# EAGLE board Dump Load 2 (EAGLE 6.2)
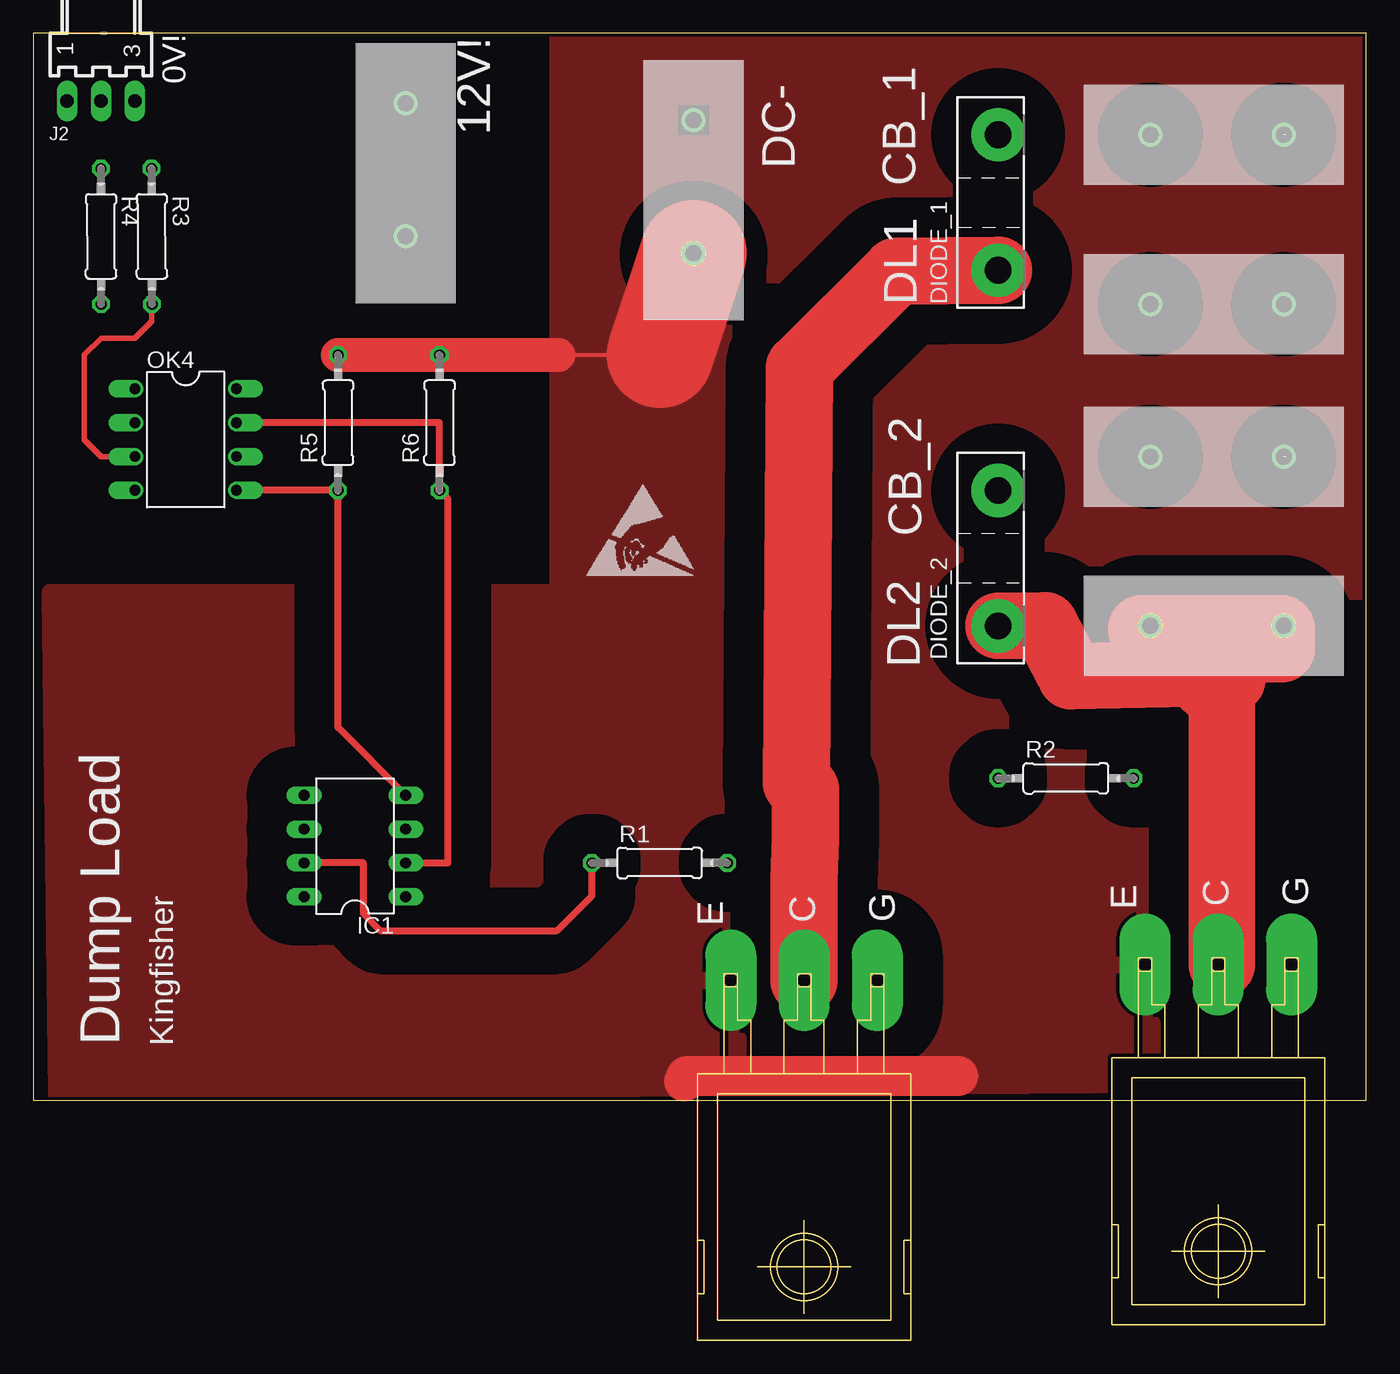
[diagram p0: board, top side]
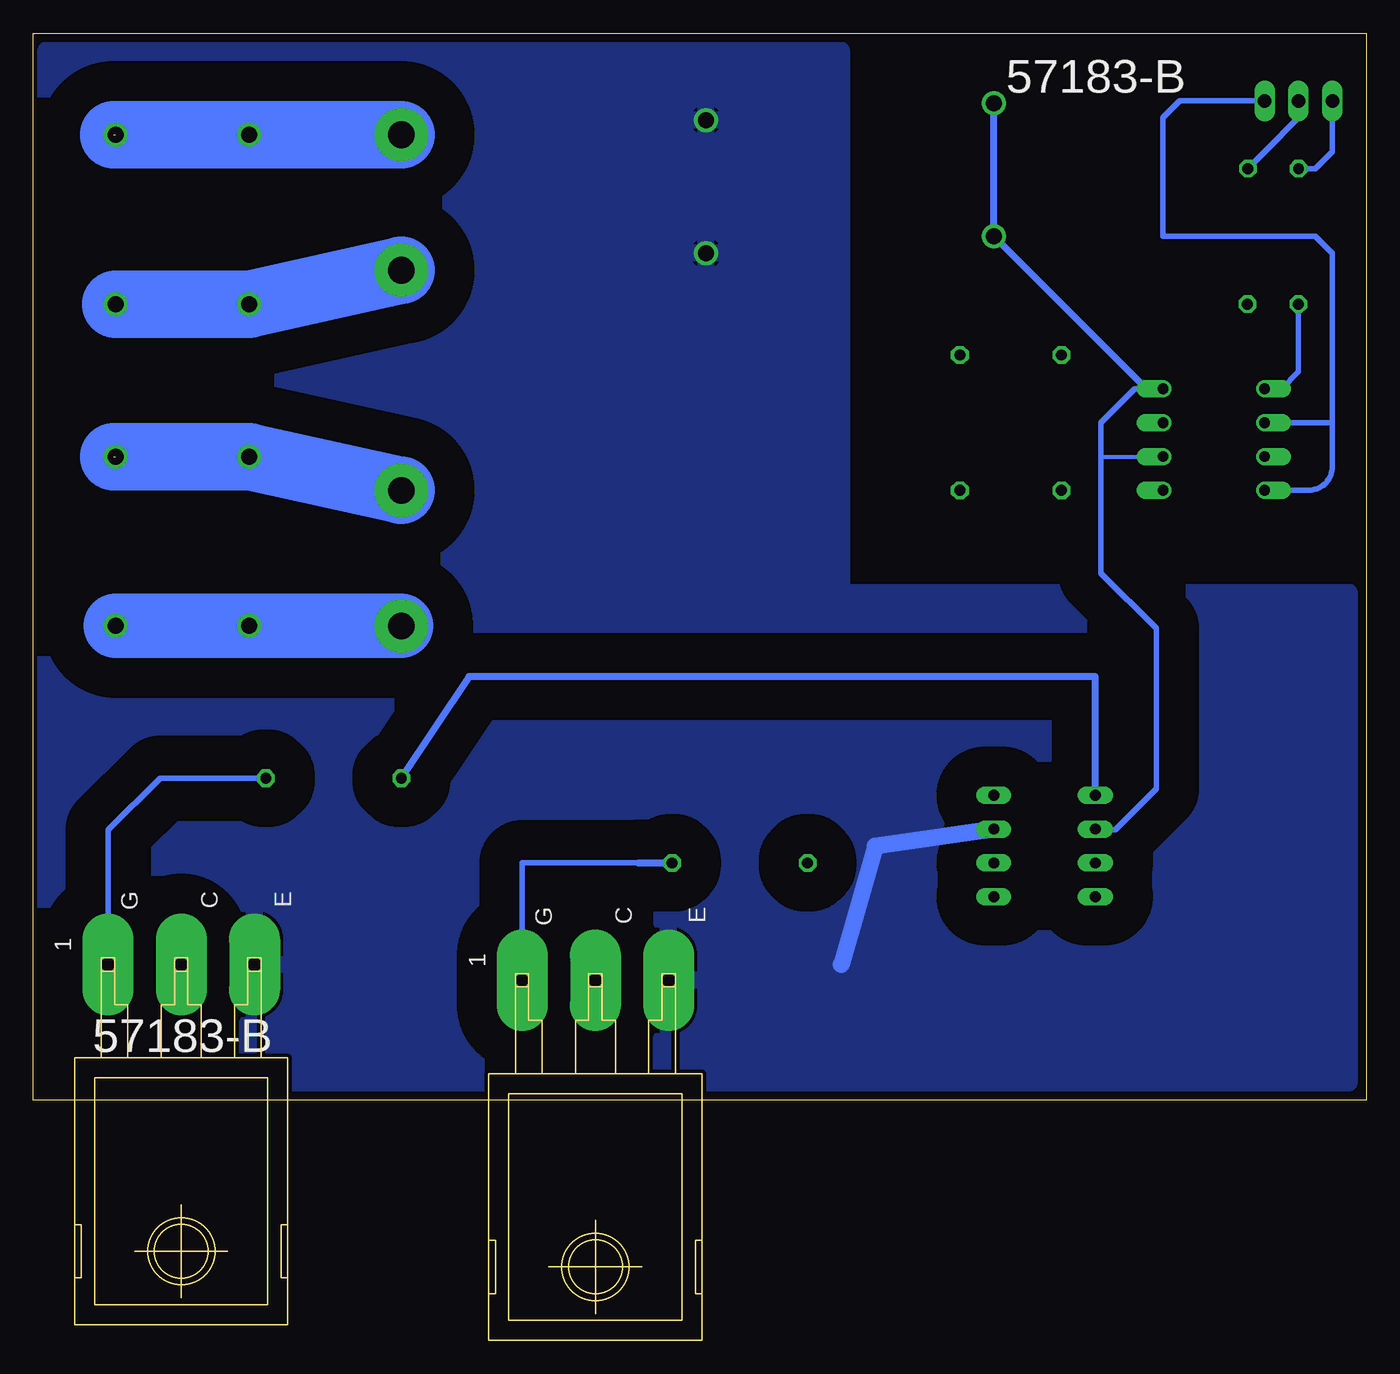
[diagram p1: board, bottom side, seen from below]

Size 100 x 80 mm. Coordinates in mm from the lower left corner, seen from the top.
Outline: 0,0 100,0 100,80 0,80 0,0
Copper layers (1*16): Top 0.035mm / dielectric 1.5mm / Bottom 0.035mm
Design rules: minimum track width 6mil, minimum drill 12mil, track to track 3mm, track to pad 3mm, pad to pad 6mil, via to via 6mil, smd to smd 0mil, copper to edge 10mil, drill to drill 10mil, minimum pad ring 10mil, minimum via ring 6mil, stop-mask expansion 2mil, vias tented up to drill 100mil, thermal gap 10mil
Net classes: 0 default: width 0.381 mm, drill 0.61 mm, clearance 0.381 mm; 1 DC link: width 2.54 mm, drill 1.321 mm, clearance 0.508 mm

## Footprints (pad centres in the part's own frame; a part is rotated, then mirrored left to right if it is on the bottom)
HIGH_AMP_TERMINAL = drill 1.2: P$1 0,0; P$2 10,0
TO-247-2V = drill 2 pad 4: 1 -5.08,0; 2 5.08,0
DIL08 = drill 0.813 long: 1 -3.81,-3.81; 2 -1.27,-3.81; 3 1.27,-3.81; 4 3.81,-3.81; 5 3.81,3.81; 6 1.27,3.81; 7 -1.27,3.81; 8 -3.81,3.81
7395-03 = drill 1.016 long: 1 2.54,0; 2 0,0; 3 -2.54,0
DIL08' = drill 0.813 offset: 1 -3.81,-3.81; 2 -1.27,-3.81; 3 1.27,-3.81; 4 3.81,-3.81; 5 3.81,3.81; 6 1.27,3.81; 7 -1.27,3.81; 8 -3.81,3.81
0207/10 = drill 0.813 octagon: 1 -5.08,0; 2 5.08,0
TO-247-FLATUD = drill 1 pad 3.81 long: P$1 0,-5.5; P$2 0,0; P$3 0,5.5

## Placement (x,y rotation side)
DC_CB_1  HIGH_AMP_TERMINAL  [HIGH_AMP_TERMINAL]  83.82,72.39 0 top
DC_CB_2  HIGH_AMP_TERMINAL  [HIGH_AMP_TERMINAL]  83.82,48.26 0 top
DIODE_1  [TO-247-2V]  72.39,67.31 90 top
DIODE_2  [TO-247-2V]  72.39,40.64 90 top
DL1  HIGH_AMP_TERMINAL  [HIGH_AMP_TERMINAL]  83.82,59.69 0 top
DL2  HIGH_AMP_TERMINAL  [HIGH_AMP_TERMINAL]  83.82,35.56 0 top
IC1  [DIL08]  24.13,19.05 90 top
J2  22-05-7038-03  [7395-03]  5.08,74.93 180 top
OK4  TIL198  [DIL08']  11.43,49.53 270 top
R1  [0207/10]  46.99,17.78 0 top
R2  [0207/10]  77.47,24.13 0 top
R3  [0207/10]  8.89,64.77 270.2 top
R4  [0207/10]  5.08,64.77 270.1 top
R5  [0207/10]  22.86,50.8 90 top
R6  [0207/10]  30.48,50.8 90 top
U$1  TO-247C  [TO-247-FLATUD]  57.83,8.99 270 bottom
U$2  TO-247C  [TO-247-FLATUD]  88.9,10.16 270 bottom
U$4  HIGH_AMP_TERMINAL  [HIGH_AMP_TERMINAL]  49.53,63.5 90 top
VCC_12V  HIGH_AMP_TERMINAL  [HIGH_AMP_TERMINAL]  27.94,64.77 90 top

## Library data of the parts
DC_CB_1 DC_CB_2 DL1 DL2 U$4 VCC_12V = rectifier_components
DIODE_1 DIODE_2 = resistor-power; OC_FARNELL: unknown; OC_NEWARK: unknown
IC1 = ic-package
J2 = con-molex; OC_FARNELL: unknown; OC_NEWARK: unknown
OK4 = optocoupler; OC_FARNELL: unknown; OC_NEWARK: unknown
R1-R6 = rcl
U$1 U$2 = to-247_n-channel_igbt

## Nets
DC- [DC link]: IC1.3 R5.2 R6.2 U$1.P$3 U$2.P$3 U$4.P$1 U$4.P$2
GND: J2.3 OK4.2 OK4.4
N$1: R1.2 U$1.P$1
N$2: R2.2 U$2.P$1
N$4: IC1.4 OK4.5 R5.1
N$5: IC1.7 R1.1
N$6: IC1.5 R2.1
N$7: J2.1 R4.1
N$8: IC1.6 OK4.6 OK4.8 VCC_12V.P$1 VCC_12V.P$2
N$9: DIODE_2.1 DL2.P$1 DL2.P$2 U$2.P$2
N$10: OK4.3 R3.2
N$11: J2.2 R3.1
N$13: OK4.1 R4.2
N$14 [DC link]: DC_CB_1.P$1 DC_CB_1.P$2 DIODE_1.2
N$15: IC1.2 OK4.7 R6.1
N$18 [DC link]: DIODE_1.1 DL1.P$1 DL1.P$2 U$1.P$2
N$19 [DC link]: DC_CB_2.P$1 DC_CB_2.P$2 DIODE_2.2

## Tracks (layer width: path | path; a pad name or v marks a point on that pad's centre or on a via)
DC-
  Top 0.305: 39.37,55.88 47.03,55.9
  Top 2.54: R5.2 R6.2 39.37,55.88
  Top 3: 69.4,1.81 49.01,1.81 48.84,1.4
  Top 8: 47.03,55.9 U$4.P$1
  Bottom 1.27: IC1.3 36.83,19.05 39.37,10.16
  pour Top: 39.37,80.01 99.06,80.01 99.06,1.27 1.75,0.51 1.27,38.1 39.37,38.1
  pour Bottom: 39.37,78.74 39.37,38.1 1.27,38.1 1.27,1.27 99.06,1.27 99.06,78.74
GND
  Bottom 0.406: 2.54,50.8 2.54,47.52 arc90 4.34,45.72 OK4.4 | 2.54,50.8 OK4.2 | J2.3 13.97,74.93 15.24,73.66 15.24,64.77 3.81,64.77 2.54,63.5 2.54,50.8
N$1
  Bottom 0.406: 54.61,17.78 63.33,17.78 U$1.P$1
  Bottom 0.508: 54.61,17.78 R1.2
N$2
  Bottom 0.406: U$2.P$1 94.38,10.16 94.38,20.26 90.5,24.14 R2.2
N$3
  Top 5: 87.68,33.81 93.66,33.81 93.66,35.37 83.15,35.37 83.15,35.2 89.97,35.2 89.97,31.52
N$4
  Top 0.508: OK4.5 R5.1 22.86,27.94 IC1.4
N$5
  Top 0.508: IC1.7 24.77,17.78 24.77,13.97 26.04,12.7 39.29,12.7 41.91,15.32 R1.1
N$6
  Bottom 0.508: IC1.5 20.32,31.75 67.31,31.75 R2.1
N$7
  Bottom 0.406: R4.1 3.81,69.85 2.54,71.12 J2.1
N$8
  Bottom 0.305: OK4.6 19.89,48.26 19.89,48.22
  Bottom 0.406: OK4.8 17.36,53.34 19.89,50.81 19.89,48.22 19.89,39.52 15.76,35.38 15.76,23.36 18.84,20.28 20.32,20.28 IC1.6
  Bottom 0.508: VCC_12V.P$2 VCC_12V.P$1 16.51,53.34 OK4.8
N$9
  Top 0.406: U$2.P$2 89.18,10.16 | 77.84,31.8 77.56,32.41
  Top 5: 89.18,10.16 89.18,29.86 87.03,31.98 77.84,31.8 | 75.89,35.56 DIODE_2.1
  Top 5.08: 77.56,32.41 75.89,35.56
  Bottom 4.826: DL2.P$2 DL2.P$1 DIODE_2.1
N$10
  Top 0.406: OK4.3 5.08,48.26 3.81,49.53 3.81,55.88 5.08,57.15 7.62,57.15 8.89,58.42 8.89,59.67 R3.2
  Bottom 0.406: R3.2 8.89,59.69
N$11
  Bottom 0.406: J2.2 5.08,73.66 7.62,71.12 7.62,71.1 R3.1
N$12
  Top 5: 49.62,63.37 49.51,63.37 49.51,63.42
N$13
  Bottom 0.406: R4.2 5.09,54.6 6.35,53.34 OK4.1
N$14  (1 unrouted)
  Bottom 5.08: DIODE_1.2 DC_CB_1.P$1 93.98,72.39
N$15
  Top 0.508: IC1.2 31.11,17.78 31.11,45.09 R6.1 30.48,50.8 OK4.7
N$18
  Top 0.406: 57.95,23.25 57.27,23.81
  Top 5.08: 57.27,23.81 57.5,54.91 64.76,62.17 DIODE_1.1 | 57.95,23.25 57.95,19.68 57.83,16.48 U$1.P$2
  Bottom 5.08: DL1.P$2 DL1.P$1 DIODE_1.1
N$19  (1 unrouted)
  Bottom 5.08: DIODE_2.2 DC_CB_2.P$1 93.98,48.26

## Text on the board
tNames: 0V! | 12V! | DC- | CB_1 | DL1 | CB_2 | DL2 | C | G | E | E | C | G | Dump Load | Kingfisher
bNames: 57183-B | 57183-B